# Altium PCB LORA_NODE.PcbDoc
Units mil, origin at the board's own origin, x right, y up, seen from the top; angles counter-clockwise.
Board outline 3149.61 x 2755.91 mil, 2 copper layers (Top Layer, Bottom Layer); 109 components, 85 nets, 348 pads, 46 vias.
Unrouted connection lines stored in the file: 13.
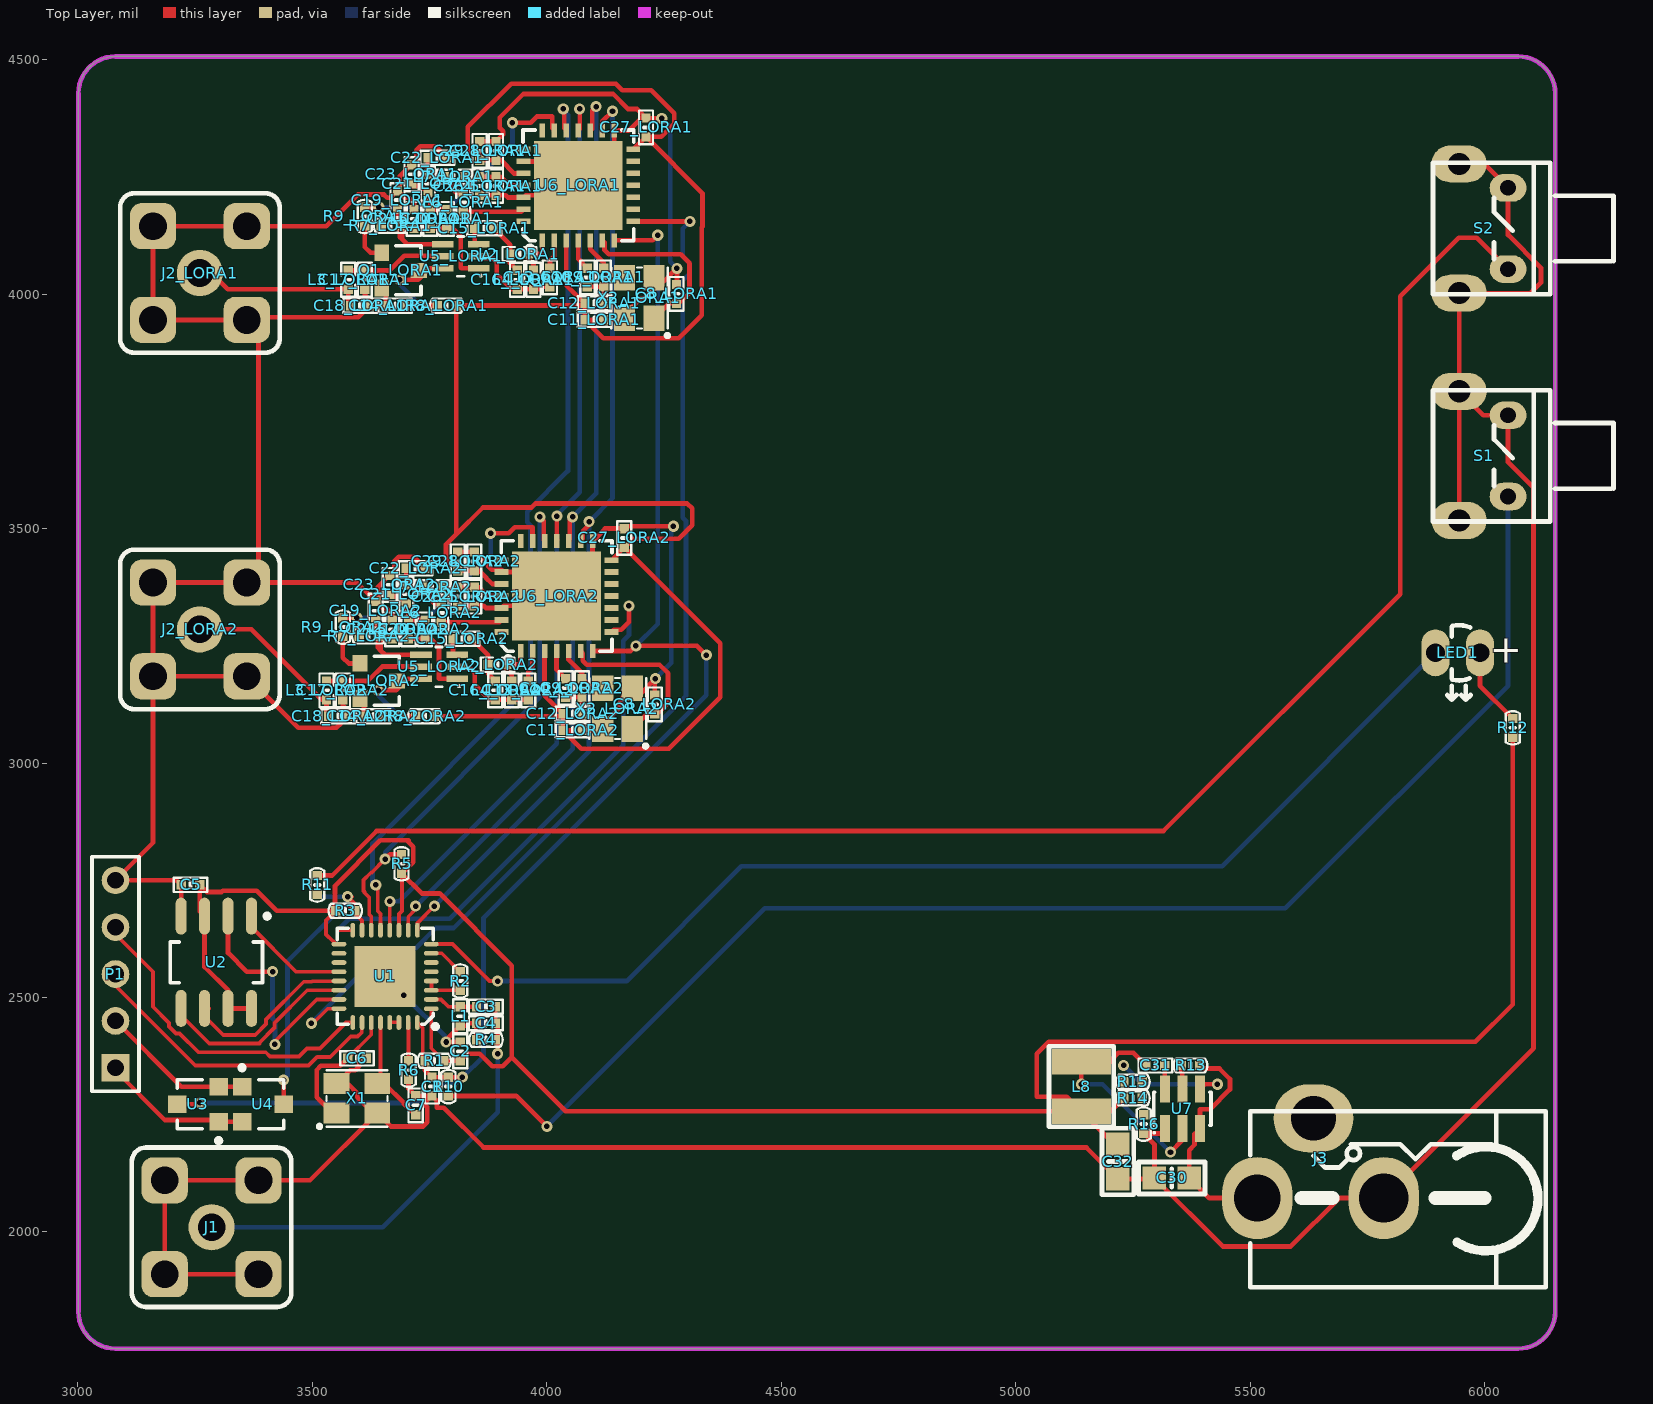
[diagram p0: Top Layer view]
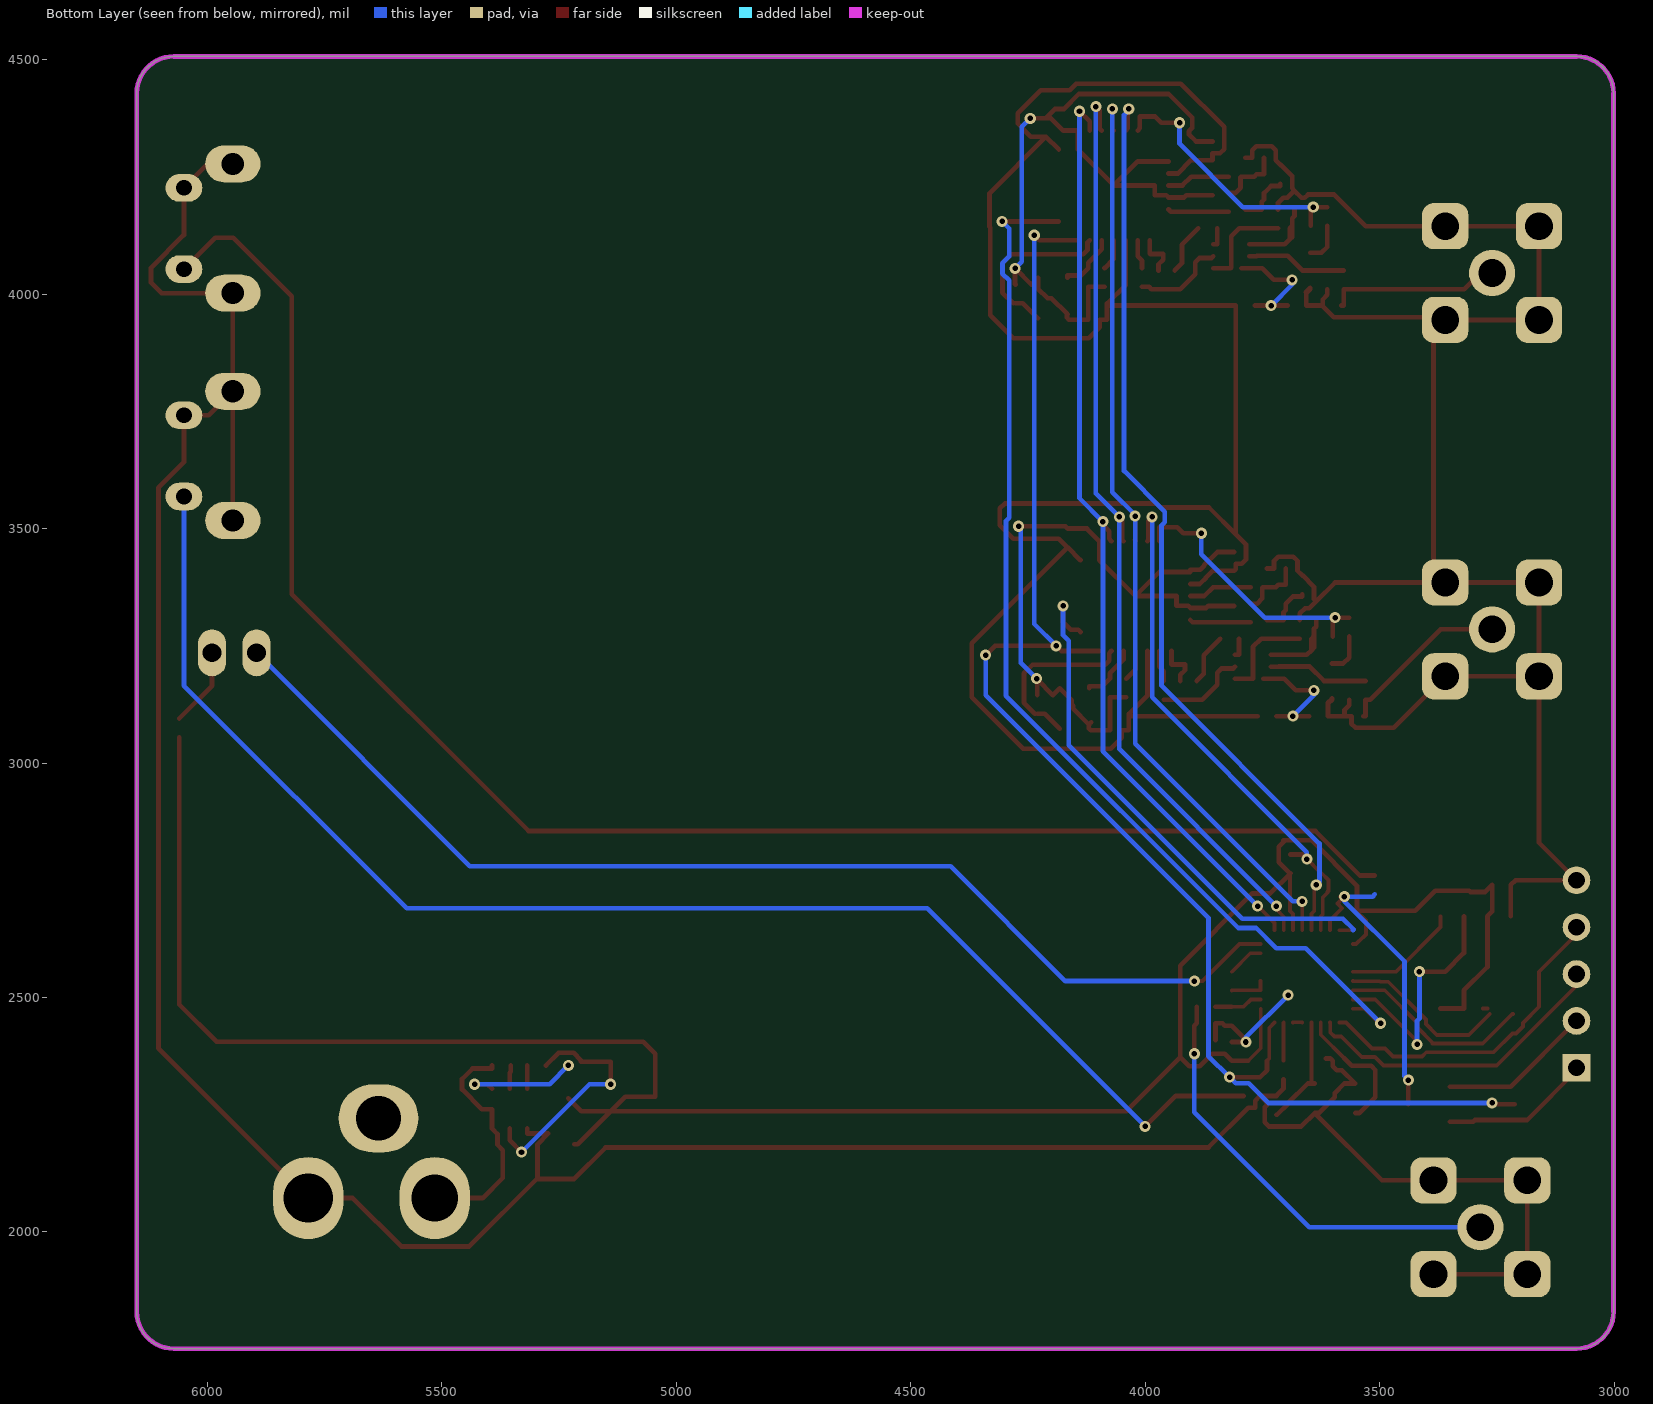
[diagram p1: Bottom Layer view, seen from below]
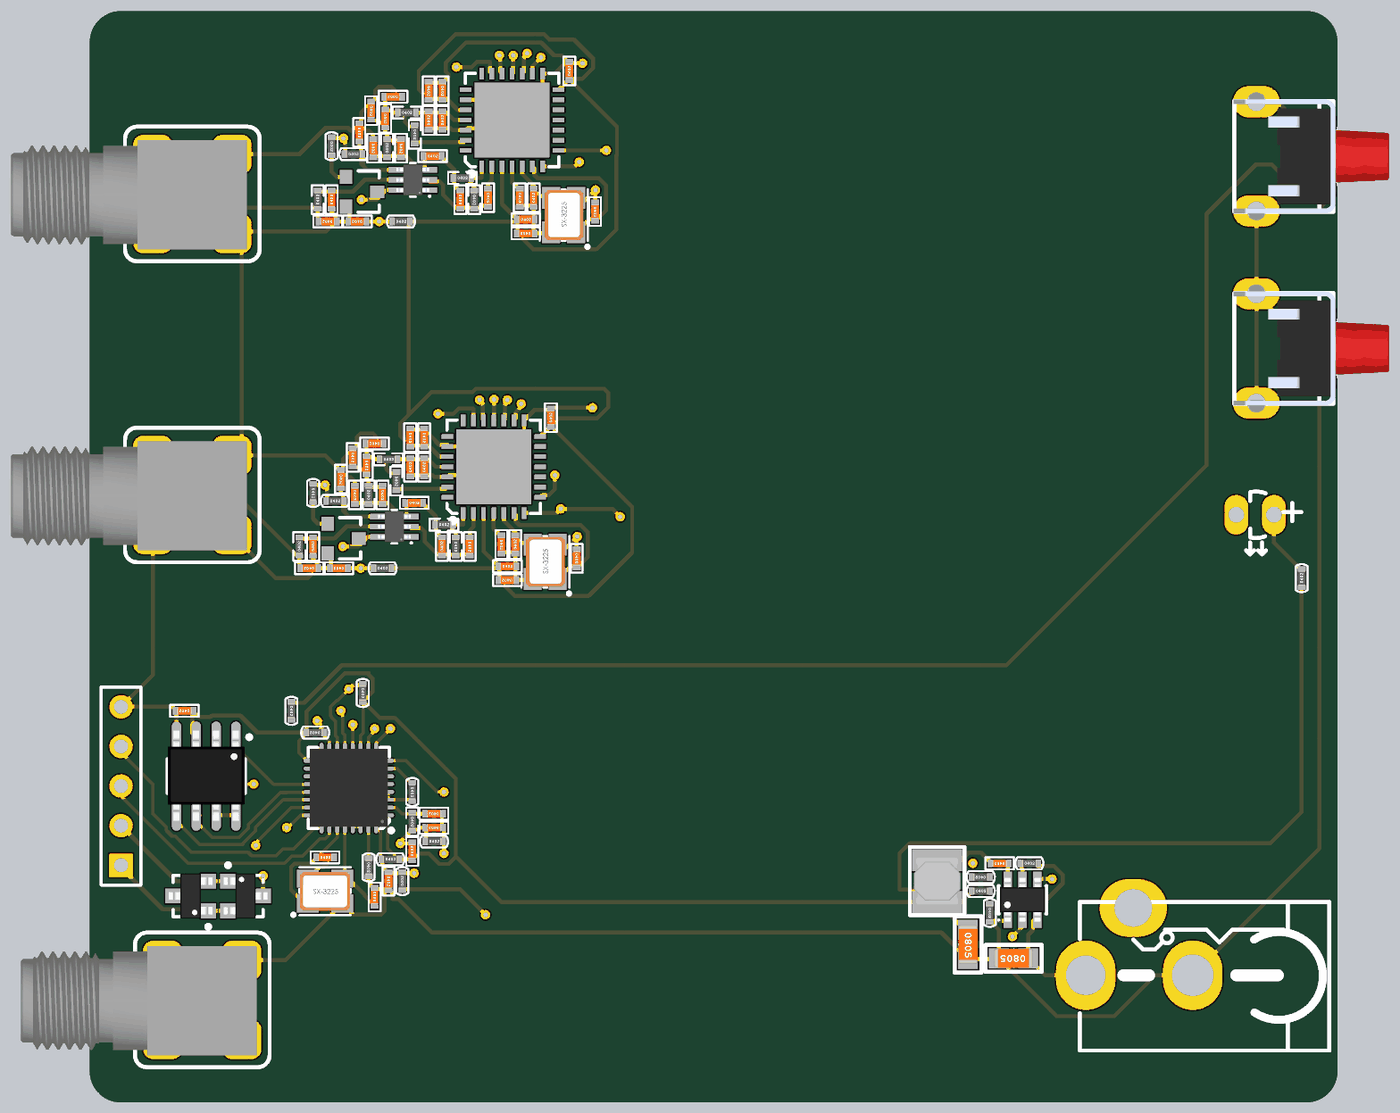
[diagram p2: 3D render of the assembled board from above, using the file's embedded part models]

## Layer stack, top to bottom
Top Solder: solder mask 0.4, Solder Resist, Dk 3.5
Top Layer: signal copper 1.4
Dielectric 1: dielectric 12.6, FR-4, Dk 4.8
Bottom Layer: signal copper 1.4
Bottom Solder: solder mask 0.4, Solder Resist, Dk 3.5

## Board outline
3000.91,1829.84 3000.91,4428.27 cw(c3079.65,4428.27) 3079.65,4507.01 6071.77,4507.01 cw(c6071.77,4428.27) 6150.51,4428.27 6150.51,1829.84 cw(c6071.77,1829.84) 6071.77,1751.1 3079.65,1751.1 cw(c3079.65,1829.84)

## Design rules (kind name [scope] priority, off if disabled: settings)
Clearance [All] p1: gap=10 ignorepadtopadclearanceinfootprint=TRUE
PolygonConnect [All] p1: connectstyle=Relief reliefconductorwidth=10 reliefentries=4 polygonreliefangle="90 Angle" airgapwidth=10
RoomDefinition LORA2 [InComponentClass('LORA2')] p1: confinementstyle=ConfineIn formatcopy=TRUE lockcomponents=FALSE outline 2765,3594.41 4423.5,3594.41 4423.5,2889.41 2765,2889.41
RoomDefinition LORA1 [InComponentClass('LORA1')] p2: confinementstyle=ConfineIn formatcopy=TRUE lockcomponents=FALSE outline 2765,4470 4470,4470 4470,3765 2765,3765
RoutingVias [All] p1: holewidth=11.81 width=23.62 viastyle="Through Hole" minholewidth=3.94 minwidth=11.81 maxholewidth=15.75 maxwidth=31.5
SMDToPlane [All] p1: distance=0
SolderMaskExpansion [All] p1: expansion=4
Width [All] p1: maxlimit=10 minlimit=2 preferedwidth=10
30 further rules are at their usual default settings.

## Classes and differential pairs
component class "Components Class 1": C1 C2 C3 C4 C5 C6 C7 C30 C31 C32 L1 L8 P1 R1 R2 R3 R4 R5 R6 R10 R13 R14 R15 R16 U1 U2 U3 U7 X1
channel class 03_LORA: LORA1 LORA2
component class U_05_POWER: C30 C31 C32 J3 L8 R13 R14 R15 R16 U7
component class U_04_KEY: LED1 R10 R11 R12 S1 S2
component class U_02_ESP8266: C1 C2 C3 C4 C5 C6 C7 J1 L1 P1 R1 R2 R3 R4 R5 R6 U1 U2 U3 X1
component class LORA1: C8_LORA1 C9_LORA1 C10_LORA1 C11_LORA1 C12_LORA1 C13_LORA1 C14_LORA1 C15_LORA1 C16_LORA1 C17_LORA1 C18_LORA1 C19_LORA1 C20_LORA1 C21_LORA1 C22_LORA1 C23_LORA1 C24_LORA1 C25_LORA1 C26_LORA1 C27_LORA1 C28_LORA1 C29_LORA1 J2_LORA1 L2_LORA1 L3_LORA1 L4_LORA1 L5_LORA1 L6_LORA1 L7_LORA1 Q1_LORA1 R7_LORA1 R8_LORA1 R9_LORA1 U5_LORA1 U6_LORA1 X2_LORA1

## Components (designator, comment, footprint, x,y, rotation, side; value= is the part's Value field where it differs from the comment)
C1 "1uF" SMT_C_0402 3755,2310 r270 top
C2 "0.1uF" SMT_C_0402 3815,2385 r90 top
C3 "8.6pF" SMT_C_0402 3870,2480 r180 top
C4 "2.4pF" SMT_C_0402 3870,2445 r180 top
C5 "100nF" SMT_C_0402 3240,2740 r180 top
C6 "3.9pF" SMT_C_0402 3595,2370 r0 top
C7 "3.9pF" SMT_C_0402 3720,2270 r90 top
C8_LORA1 "15pF" SMT_C_0402 4276.5,4000.59 r270 top (schematic designator C8)
C8_LORA2 "15pF" SMT_C_0402 4230,3125 r270 top (schematic designator C8)
C9_LORA1 "15pF" SMT_C_0402 4121.5,4035.59 r90 top (schematic designator C9)
C9_LORA2 "15pF" SMT_C_0402 4075,3160 r90 top (schematic designator C9)
C10_LORA1 "100nF" SMT_C_0402 4086.5,4035.59 r270 top (schematic designator C10)
C10_LORA2 "100nF" SMT_C_0402 4040,3160 r270 top (schematic designator C10)
C11_LORA1 "47pF" SMT_C_0402 4101.5,3945.59 r180 top (schematic designator C11)
C11_LORA2 "47pF" SMT_C_0402 4055,3070 r180 top (schematic designator C11)
C12_LORA1 "100nF" SMT_C_0402 4101.5,3980.59 r0 top (schematic designator C12)
C12_LORA2 "100nF" SMT_C_0402 4055,3105 r0 top (schematic designator C12)
C13_LORA1 "100nF" SMT_C_0402 4006.5,4035.59 r270 top (schematic designator C13)
C13_LORA2 "100nF" SMT_C_0402 3960,3155 r270 top (schematic designator C13)
C14_LORA1 "100pF" SMT_C_0402 3676.5,3975.59 r180 top (schematic designator C14)
C14_LORA2 "100pF" SMT_C_0402 3630,3100 r180 top (schematic designator C14)
C15_LORA1 "47pF" SMT_C_0402 3866.5,4140.59 r0 top (schematic designator C15)
C15_LORA2 "47pF" SMT_C_0402 3820,3265 r0 top (schematic designator C15)
C16_LORA1 "NC" SMT_C_0402 3936.5,4030.59 r90 top (schematic designator C16)
C16_LORA2 "NC" SMT_C_0402 3890,3155 r90 top (schematic designator C16)
C17_LORA1 "NC" SMT_C_0402 3611.5,4030.59 r90 top (schematic designator C17)
C17_LORA2 "NC" SMT_C_0402 3565,3155 r90 top (schematic designator C17)
C18_LORA1 "NC" SMT_C_0402 3601.5,3975.59 r180 top (schematic designator C18)
C18_LORA2 "NC" SMT_C_0402 3555,3100 r180 top (schematic designator C18)
C19_LORA1 "100pF" SMT_C_0402 3681.5,4200.59 r270 top (schematic designator C19)
C19_LORA2 "100pF" SMT_C_0402 3635,3325 r270 top (schematic designator C19)
C20_LORA1 "2.7pF" SMT_C_0402 3786.5,4160.59 r270 top (schematic designator C20)
C20_LORA2 "2.7pF" SMT_C_0402 3740,3285 r270 top (schematic designator C20)
C21_LORA1 "47pF" SMT_C_0402 3746.5,4235.59 r270 top (schematic designator C21)
C21_LORA2 "47pF" SMT_C_0402 3700,3360 r270 top (schematic designator C21)
C22_LORA1 "4.7pF" SMT_C_0402 3766.5,4290.59 r180 top (schematic designator C22)
C22_LORA2 "4.7pF" SMT_C_0402 3720,3415 r180 top (schematic designator C22)
C23_LORA1 "6.8pF" SMT_C_0402 3711.5,4255.59 r270 top (schematic designator C23)
C23_LORA2 "6.8pF" SMT_C_0402 3665,3380 r270 top (schematic designator C23)
C24_LORA1 "6.8pF" SMT_C_0402 3716.5,4160.59 r270 top (schematic designator C24)
C24_LORA2 "6.8pF" SMT_C_0402 3670,3285 r270 top (schematic designator C24)
C25_LORA1 "47pF" SMT_C_0402 3891.5,4230.59 r90 top (schematic designator C25)
C25_LORA2 "47pF" SMT_C_0402 3845,3355 r90 top (schematic designator C25)
C26_LORA1 "10nF" SMT_C_0402 3856.5,4230.59 r90 top (schematic designator C26)
C26_LORA2 "10nF" SMT_C_0402 3810,3355 r90 top (schematic designator C26)
C27_LORA1 "100nF" SMT_C_0402 4211.5,4355.59 r90 top (schematic designator C27)
C27_LORA2 "100nF" SMT_C_0402 4165,3480 r90 top (schematic designator C27)
C28_LORA1 "47pF" SMT_C_0402 3891.5,4305.59 r270 top (schematic designator C28)
C28_LORA2 "47pF" SMT_C_0402 3845,3430 r270 top (schematic designator C28)
C29_LORA1 "100nF" SMT_C_0402 3856.5,4305.59 r270 top (schematic designator C29)
C29_LORA2 "100nF" SMT_C_0402 3810,3430 r270 top (schematic designator C29)
C30 "22uF 25V" SMT_C_0805 5332.76,2115 r180 top
C31 "1uF" SMT_C_0402 5297.76,2355 r180 top
C32 "22uF" SMT_C_0805 5217.76,2150 r270 top
J1 "SMA-60-12-5M8-049" SMA-60-12-5M8-049 3285,2010 r90 top
J2_LORA1 "SMA-60-12-5M8-049" SMA-60-12-5M8-049 3260,4045 r90 top (schematic designator J2)
J2_LORA2 "SMA-60-12-5M8-049" SMA-60-12-5M8-049 3260,3285 r90 top (schematic designator J2)
J3 "DC-JACK" DC-JACK-6.2mm-ROUND 5785,2072.24 r180 top
L1 "1nH" SMT_L_0402 3815,2460 r270 top
L2_LORA1 "4.7pF" SMT_L_0402 3941.5,4085.59 r0 top (schematic designator L2)
L2_LORA2 "4.7pF" SMT_L_0402 3895,3210 r0 top (schematic designator L2)
L3_LORA1 "47pF" SMT_L_0402 3576.5,4030.59 r90 top (schematic designator L3)
L3_LORA2 "47pF" SMT_L_0402 3530,3155 r90 top (schematic designator L3)
L4_LORA1 "18nH" SMT_L_0402 3971.5,4030.59 r270 top (schematic designator L4)
L4_LORA2 "18nH" SMT_L_0402 3925,3155 r270 top (schematic designator L4)
L5_LORA1 "12nH" SMT_L_0402 3751.5,4160.59 r90 top (schematic designator L5)
L5_LORA2 "12nH" SMT_L_0402 3705,3285 r90 top (schematic designator L5)
L6_LORA1 "2.2nH" SMT_L_0402 3821.5,4195.59 r270 top (schematic designator L6)
L6_LORA2 "2.2nH" SMT_L_0402 3775,3320 r270 top (schematic designator L6)
L7_LORA1 "82nH" SMT_L_0402 3801.5,4250.59 r0 top (schematic designator L7)
L7_LORA2 "82nH" SMT_L_0402 3755,3375 r0 top (schematic designator L7)
L8 "4.7uH" SMT_L_3.3mm 5140,2310 r90 top
LED1 "直插LED-3mm" 直插LED-3mm 5990,3235 r180 top
P1 "Header 5" HDR1X5 3080,2350 r90 top
Q1_LORA1 "2SC3356" SOT-23S 3687.13,4050.59 r270 top (schematic designator Q1)
Q1_LORA2 "2SC3356" SOT-23S 3640.63,3175 r270 top (schematic designator Q1)
R1 "12K" SMT_R_0402 3760,2365 r0 top
R2 "12K" SMT_R_0402 3815,2535 r270 top
R3 "12K" SMT_R_0402 3570,2685 r180 top
R4 "12K" SMT_R_0402 3870,2410 r0 top
R5 "1K" SMT_R_0402 3690,2785 r270 top
R6 "12K" SMT_R_0402 3705,2345 r270 top
R7_LORA1 "10K" SMT_R_0402 3666.5,4145.59 r0 top (schematic designator R7)
R7_LORA2 "10K" SMT_R_0402 3620,3270 r0 top (schematic designator R7)
R8_LORA1 "1M" SMT_R_0402 3786.5,3975.59 r0 top (schematic designator R8)
R8_LORA2 "1M" SMT_R_0402 3740,3100 r0 top (schematic designator R8)
R9_LORA1 "1K" SMT_R_0402 3611.5,4165.59 r270 top (schematic designator R9)
R9_LORA2 "1K" SMT_R_0402 3565,3290 r270 top (schematic designator R9)
R10 "470" SMT_R_0402 3790,2310 r90 top
R11 "470" SMT_R_0402 3510,2740 r270 top
R12 "470" SMT_R_0402 6060,3075 r90 top
R13 "100k" SMT_R_0402 5372.76,2355 r0 top
R14 "47k 1%" SMT_R_0402 5250,2285 r0 top
R15 "75k 1%" SMT_R_0402 5250,2320 r180 top
R16 "15k 1%" SMT_R_0402 5272.76,2230 r270 top
S1 "按键开关-6x6-卧式-直插" 按键开关-6x6-卧式-直插 6050,3655 r0 top
S2 "按键开关-6x6-卧式-直插" 按键开关-6x6-卧式-直插 6050,4140 r0 top
U1 "ESP8266" QFN32 3655,2545 r180 top
U2 "W25Qxx" SOP-8 3295,2575 r270 top
U3 "DTC143" SOT23-3 3255.71,2272.4 r90 top
U4 "DTC143" SOT23-3 3394.29,2272.4 r270 top
U5_LORA1 "UPG2179" SC70-6 3816.5,4080.59 r180 top (schematic designator U5)
U5_LORA2 "UPG2179" SC70-6 3770,3205 r180 top (schematic designator U5)
U6_LORA1 "SX1278" QFN28-6x6 4067.09,4231.77 r90 top (schematic designator U6)
U6_LORA2 "SX1278" QFN28-6x6 4020.59,3356.18 r90 top (schematic designator U6)
U7 "MP1470" SOT23-6 5355.35,2262.68 r0 top
X1 "26MHz" SMT_XTAL_3225 3595,2285 r0 top
X2_LORA1 "32MHz" SMT_XTAL_3225 4197.09,3991.77 r90 top (schematic designator X2)
X2_LORA2 "32MHz" SMT_XTAL_3225 4150.59,3116.18 r90 top (schematic designator X2)

## Footprints (in the part's own frame and the unit in brackets; to place one, negate y for a bottom-side part, rotate by r counter-clockwise, add the part's x,y. Pads: shape width x height; smd on the part's side, far side on the other; paste and mask are expansions set on the pad)
DC-JACK-6.2mm-ROUND [mil] "电源插孔"
  oval 150x175 hole 100: 1(270,0)
  oval 150x175 hole 105: 2(0,0)
  oval 170x145 hole 95: 3(150,-170)
  silkscreen extent -345,-185 285,190, body extent -350,-185 285,190, height 433
HDR1X5 [mm] "Connector; Header; 5 Position"
  rect 1.5x1.5 hole 0.9: 1(0,0)
  round 1.5 hole 0.9: 2(2.54,0) 3(5.08,0) 4(7.62,0) 5(10.16,0)
  silkscreen extent -1.27,-1.27 11.43,1.27
QFN28-6x6 [mm]
  rect 4.8x4.8 smd: 0(0,0)
  rect 0.75x0.3 smd: 1(-2.975,1.95) 2(-2.975,1.3) 3(-2.975,0.65) 4(-2.975,0) 5(-2.975,-0.65) 6(-2.975,-1.3) 7(-2.975,-1.95) 15(2.975,-1.95) 16(2.975,-1.3) 17(2.975,-0.65) 18(2.975,0) 19(2.975,0.65) 20(2.975,1.3) 21(2.975,1.95)
  rect 0.3x0.75 smd: 8(-1.95,-2.975) 9(-1.3,-2.975) 10(-0.65,-2.975) 11(0,-2.975) 12(0.65,-2.975) 13(1.3,-2.975) 14(1.95,-2.975) 22(1.95,2.975) 23(1.3,2.975) 24(0.65,2.975) 25(0,2.975) 26(-0.65,2.975) 27(-1.3,2.975) 28(-1.95,2.975)
  silkscreen extent -3.61,-3 3,3, body extent -3,-3 3,3, height 1.01
QFN32 [mm] "32-Pin Quad Flat No-Lead 0.5 mm Pitch, IPC High Density"
  oval 0.8x0.25 smd: 1(-2.5,1.75) 2(-2.5,1.25) 3(-2.5,0.75) 4(-2.5,0.25) 5(-2.5,-0.25) 6(-2.5,-0.75) 7(-2.5,-1.25) 8(-2.5,-1.75) 17(2.5,-1.75) 18(2.5,-1.25) 19(2.5,-0.75) 20(2.5,-0.25) 21(2.5,0.25) 22(2.5,0.75) 23(2.5,1.25) 24(2.5,1.75)
  oval 0.25x0.8 smd: 9(-1.75,-2.5) 10(-1.25,-2.5) 11(-0.75,-2.5) 12(-0.25,-2.5) 13(0.25,-2.5) 14(0.75,-2.5) 15(1.25,-2.5) 16(1.75,-2.5) 25(1.75,2.5) 26(1.25,2.5) 27(0.75,2.5) 28(0.25,2.5) 29(-0.25,2.5) 30(-0.75,2.5) 31(-1.25,2.5) 32(-1.75,2.5)
  rect 3.3x3.3 smd paste-2.54: 33(0,0)
  silkscreen extent -2.84,-2.6 2.6,2.84, body extent -2.51,-2.51 2.51,2.51, height 0.8
SC70-6 [mil] "SC70/SOT-323 (DCK) Package. 6-Lead Plastic SC70."
  rect 46x14 smd: 1(-38.5,25.59) 2(-38.5,0) 3(-38.5,-25.59) 4(38.5,-25.59) 5(38.5,0) 6(38.5,25.59)
  silkscreen extent -44,-42 7,42, body extent -41,-39 41,39, height 36
SMA-60-12-5M8-049 [mm] "SMA-60-12-5M8-049"
  round 2.5 hole 1.5: 1(0,0)
  rrect50% 2.5x2.5 hole 1.5: 2(-2.54,2.54) 3(2.54,2.54) 4(2.54,-2.54) 5(-2.54,-2.54)
  silkscreen extent -4.32,-4.32 4.32,4.32, body extent -3.56,-3.49 3.44,11.61, height 10.86
SMT_C_0402 [mil] "Surface mount capacitor 0402"
  rect 20x20 smd: 1(-20,0) 2(20,0)
  silkscreen extent -36,-15 36,15, body extent -20,-10 20,10, height 20
SMT_C_0805 [mil] "Surface mount capacitor 0805"
  rect 50x50 smd: 1(-37,0) 2(37,0)
  silkscreen extent -71,-34 71,34, body extent -49,-24 49,25, height 31
SMT_L_3.3mm [mm] "LPO3310 SMT Power Inductor, 3.3x3.3x1mm"
  rect 1.4x3.2 smd: 1(-1.34,0) 2(1.34,0)
  silkscreen extent -2.18,-1.75 2.18,1.75, body extent -1.5,-1.5 1.5,1.5, height 1
SMT_L_0402 [mil] "Surface mount inductor 0402"
  rect 20x20 smd: 1(-20,0) 2(20,0)
  silkscreen extent -36,-15 36,15, body extent -20,-10 20,10, height 20
SMT_R_0402 [mil] "Surface mount resistor 0402"
  rect 20x20 smd: 1(-20,0) 2(20,0)
  silkscreen extent -36,-15 36,15, body extent -20,-10 20,10, height 20
SMT_XTAL_3225 [mm] "Quartz Crystal, SM; Body 3.2 x 2.5 mm"
  rect 1.4x1.15 smd: 1(-1.1,-0.8) 2(1.1,-0.8) 3(1.1,0.8) 4(-1.1,0.8)
  silkscreen extent -2.13,-1.62 1.65,1.52, body extent -1.6,-1.27 1.6,1.23, height 0.81
SOP-8 [mm] "8-Pin Small Outline Integrated Circuit 1.27 mm Pitch, IPC Low Density"
  oval 2x0.6 smd: 1(-2.5,1.905) 2(-2.5,0.635) 3(-2.5,-0.635) 4(-2.5,-1.905) 5(2.5,-1.905) 6(2.5,-0.635) 7(2.5,0.635) 8(2.5,1.905)
  silkscreen extent -2.62,-2.5 1.1,2.88, body extent -2.92,-2.45 2.86,2.45, height 1.45
SOT23-3 [mm] "SOT-23; 3 Leads; Body 3.0 x 2.5 mm, inc. leads (LxW max)"
  rect 0.95x1 smd: 1(-0.95,-1.125) 2(0.95,-1.125) 3(0,1.125)
  silkscreen extent -2.1,-1.25 1.33,1.13, body extent -1.45,-1.4 1.45,1.4, height 1.3
SOT23-6 [mm] "SOT-457/SC-74; 6 Leads; Body 3 x 3 mm, inc. leads (LxW max)"
  rect 0.55x1.45 smd: 1(-0.95,-1.075) 2(0,-1.075) 3(0.95,-1.075) 4(0.95,1.075) 5(0,1.075) 6(-0.95,1.075)
  silkscreen extent -1.57,-1.35 1.55,0.9, body extent -1.45,-1.4 1.45,1.4, height 1.45
SOT-23S [mm]
  rect 0.9x0.8 smd: 1(-0.95,-1) 2(0.95,-1)
  rect 0.8x0.9 smd: 3(0,1)
  silkscreen extent -1.34,-0.22 1.31,1.12, body extent -1.16,-1.31 1.15,1.3, height 0.38
按键开关-6x6-卧式-直插 [mm] "按键开关-6x6-卧式-直插"
  oval 2x1.5 hole 0.85: 1(0,-2.2) 2(0,2.2)
  oval 3x2 hole 1.2: 3(-2.65,3.5) 4(-2.65,-3.5)
  silkscreen extent -4.06,-3.56 5.71,3.56, body extent -4.13,-4.18 5.84,4.18, height 7.37
直插LED-3mm [mil] "直插LED"
  oval 60x100 hole 40: 1(0,0) 2(95,0)
  silkscreen extent 20,-59 70,100

## Part data
C1 C2 C3 C4 C6 C7 C8_LORA1 C8_LORA2 C9_LORA1 C9_LORA2 C10_LORA1 C10_LORA2 C11_LORA1 C11_LORA2 C12_LORA1 C12_LORA2 C13_LORA1 C13_LORA2 C14_LORA1 C14_LORA2 C15_LORA1 C15_LORA2 C16_LORA1 C16_LORA2 C17_LORA1 C17_LORA2 C18_LORA1 C18_LORA2 C19_LORA1 C19_LORA2 C20_LORA1 C20_LORA2 C21_LORA1 C21_LORA2 C22_LORA1 C22_LORA2 C23_LORA1 C23_LORA2 C24_LORA1 C24_LORA2 C25_LORA1 C25_LORA2 C26_LORA1 C26_LORA2 C27_LORA1 C27_LORA2 C28_LORA1 C28_LORA2 C29_LORA1 C29_LORA2: library part SMT_C_0402_1, "Surface mount capacitor 0402"
C5 C31: library part SMT_C_0402, "Surface mount capacitor 0402"
C30 C32: library part SMT_C_0805, "Surface mount capacitor 0805"
J1 J2_LORA1 J2_LORA2: "sma 60-12-5M8-049"
J3: "电源插孔"
L1 L2_LORA1 L2_LORA2 L3_LORA1 L3_LORA2 L4_LORA1 L4_LORA2 L5_LORA1 L5_LORA2 L6_LORA1 L6_LORA2 L7_LORA1 L7_LORA2: library part SMT_L_0402, "Surface mount inductor 0402"
L8: library part SMT_L_3.3mm, "LPO3310 SMT Power Inductor, 3.3x3.3x1mm"
P1: "Header, 5-Pin", LatestRevisionDate=17-Jul-2002, LatestRevisionNote="Re-released for DXP Platform.", Publisher="Altium Limited"
Q1_LORA1 Q1_LORA2: library part NPN, "NPN Bipolar Transistor", Code_JEDEC=TO-226-AA, LatestRevisionDate=17-Jul-2002, LatestRevisionNote="Re-released for DXP Platform.", PackageDescription="TO, Flat Index; 3 In-Line, Axial Leads; Body Dia. 4.8mm; Leads 0.55 x 0.51 mm (max)", PackageReference=TO-226-AA, Published=8-Jun-2000, Publisher="Altium Limited"
R1 R2 R3 R4 R5 R6 R7_LORA1 R7_LORA2 R8_LORA1 R8_LORA2 R9_LORA1 R9_LORA2 R10 R11 R12 R13 R14 R15 R16: library part SMT_R_0402, "Surface mount resistor 0402"
U2: "Serial flash memory with dual and quad SPI"
U3 U4: "Digital transistors (built-in resistors)"
U7: "High-Efficiency, 2A, 16V, 500kHz  Synchronous, Step-Down Converter"
X1 X2_LORA1 X2_LORA2: library part SMT_XTAL_PASSIVE, "Passive crystal"

## Via types
v1: diameter 23.62, hole 11.81, Top Layer to Bottom Layer, 46 vias

## Nets (pads, with @x,y where several pads share a name; then routed paths per layer and width w, separated by ;. In a path a pad name is that pad's centre, name@x,y a point inside that pad or via, vN(x,y) a via of type N, cw(c..) or ccw(c..) an arc to the next point about the centre after c; other vN are vias at no path point)
ADC: U1.6
ANT: C3.1 C4.1 J1.1 R4.2 | length 938.6
  Top Layer w10: C3.1 C4.1 3895,2440 v1(3895,2380)
  Bottom Layer w10: J1.1 3650,2010 3895,2255 v1(3895,2380)
ANT_LORA1: C18_LORA1.2 J2_LORA1.1 L3_LORA1.1 | length 370.8
  Top Layer w10: J2_LORA1.1 3285,4045 3319.41,4010.59 L3_LORA1.1 3576.5,3975.59 C18_LORA1.2
ANT_LORA2: C18_LORA2.2 J2_LORA2.1 L3_LORA2.1 | length 372.1
  Top Layer w10: J2_LORA2.1 3370,3285 3520,3135 L3_LORA2.1 3530,3100 C18_LORA2.2
CLK: U1.21 U2.6 | length 373.2
  Top Layer w8: U2.6@3265,2465 3310,2420 3378.04,2420 3401.19,2443.15 3401.19,2453.15 3481.51,2533.47 3498.47,2533.47 3499.39,2534.39 3555.81,2534.39 U1.21 ; U2.6 U2.6@3279.39,2476.57
CS: U1.20 U2.1 | length 249.4
  Top Layer w8: U2.1 3370,2650 3465.16,2554.84 U1.20
D0: U1.22 U2.5 | length 422.5
  Top Layer w8: U2.5@3215,2465 3216.96,2465 3279.96,2402 3387.46,2402 3386.48,2402.98 3419.19,2435.69 3419.19,2445.69 3488.97,2515.47 U1.22
D1: U1.23 U2.2 | length 527.1
  Top Layer w8: v1(3420,2400) 3420,2406.5 3509.29,2495.79 U1.23
  Top Layer w10: U2.2 3320,2595 3360,2555 v1(3415,2555)
  Bottom Layer w10: v1(3415,2555) 3415,2455 3420,2450 v1(3420,2400)
DIO0_LORA1: U1.24 U6_LORA1.8 | length 2315.8
  Top Layer w8: v1@3495,2445 v1(3497.92,2445) 3501.5,2445 3532.6,2476.1 U1.24
  Top Layer w10: U6_LORA1.8 4187.49,4155 v1(4305,4155)
  Bottom Layer w10: v1(3497.92,2445) 3657.92,2605 3720,2605 3763.19,2648.19 3801.47,2648.19 4296.81,3143.53 4296.81,3516.11 4290,3522.92 4290,4029.6 4304.29,4043.89 4304.29,4066.11 4290,4080.4 4290,4140 v1(4305,4155)
DIO0_LORA2: U1.16 U6_LORA2.8 | length 1187.3
  Top Layer w8: 3555,2645 3556.57,2643.43 U1.16
  Top Layer w10: U6_LORA2.8 4142.4,3284.09 4158.69,3284.09 4175,3300.4 v1(4175,3335)
  Bottom Layer w10: 3556.57,2643.43 3555,2645 3578.19,2668.19 3793.19,2668.19 4163.19,3038.19 4163.19,3261.11 4175,3272.92 v1(4175,3335)
DIO1_LORA1: U6_LORA1.9
DIO1_LORA2: U6_LORA2.9
DIO2_LORA1: U6_LORA1.10
DIO2_LORA2: U6_LORA2.10
DIO3_LORA1: U6_LORA1.11
DIO3_LORA2: U6_LORA2.11
DIO4_LORA1: U6_LORA1.12
DIO4_LORA2: U6_LORA2.12
DIO5_LORA1: U6_LORA1.13
DIO5_LORA2: U6_LORA2.13
DTR: P1.1 U3.1 U4.2 | length 336
  Top Layer w10: P1.1@3065,2350 P1.1 3080,2344.22 3185.52,2238.7 3296.3,2238.7 U3.1 U4.2
EN: R2.1 U1.7 | length 77.8
  Top Layer w8: U1.7 3775.79,2594.21 R2.1
GND: C1.2 C2.2 C4.2 C5.2 C6.2 C7.2 C8_LORA1.1 C8_LORA2.1 C9_LORA1.1 C9_LORA2.1 C10_LORA1.2 C10_LORA2.2 C11_LORA1.1 C11_LORA2.1 C12_LORA1.2 C12_LORA2.2 C13_LORA1.2 C13_LORA2.2 C14_LORA1.2 C14_LORA2.2 C16_LORA1.1 C16_LORA2.1 C17_LORA1.1 C17_LORA2.1 C18_LORA1.1 C18_LORA2.1 C19_LORA1.1 C19_LORA2.1 C22_LORA1.1 C22_LORA2.1 C23_LORA1.1 C23_LORA2.1 C24_LORA1.1 C24_LORA2.1 C25_LORA1.1 C25_LORA2.1 C26_LORA1.1 C26_LORA2.1 C27_LORA1.2 C27_LORA2.2 C28_LORA1.1 C28_LORA2.1 C29_LORA1.1 C29_LORA2.1 C30.2 C32.2 J1.2 J1.3 J1.4 J1.5 J2_LORA1.2 J2_LORA1.3 J2_LORA1.4 J2_LORA1.5 J2_LORA2.2 J2_LORA2.3 J2_LORA2.4 J2_LORA2.5 J3.2 L1.2 L4_LORA1.2 L4_LORA2.2 P1.5 Q1_LORA1.2 Q1_LORA2.2 R4.1 R6.2 R16.2 S1.2 S1.3 S1.4 S2.2 S2.3 S2.4 U1.33 U2.4 U5_LORA1.2 U5_LORA2.2 U6_LORA1.0 U6_LORA1.15 U6_LORA1.23 U6_LORA1.26 U6_LORA2.0 U6_LORA2.15 U6_LORA2.23 U6_LORA2.26 U7.1 X1.2 X1.4 X2_LORA1.2 X2_LORA1.4 X2_LORA2.2 X2_LORA2.4 | length 15202.6
  Top Layer w10: J2_LORA1.2 J2_LORA1.3 ; J2_LORA1.2@3185,3945 J2_LORA1.5 J2_LORA1.5@3385,3945 ; J2_LORA1.3@3185,4145 J2_LORA1.4 3529.7,4145 3597.1,4212.4 3652.61,4212.4 3659.42,4205.59 3666.5,4205.59 C19_LORA1.1 ; U2.4 C5.2 3210,2750 P1.5 3160,2830 J2_LORA2.2 ; J1.5 J1.2 J1.3 J1.4 3494.8,2110 X1.2 ; C17_LORA2.1 3565,3123 3575,3113 C18_LORA2.1 ; Q1_LORA2.2 3610.67,3128.19 3601.26,3135 3610,3126.26 C14_LORA2.2 C18_LORA2.1 ; C17_LORA1.1 3611.5,3998.59 3621.5,3988.59 C18_LORA1.1 ; C6.2 3605.2,2370 3600,2364.8 3600,2353.79 3591.21,2345 3580.2,2345 X1.4 3575.31,2316.5 3595.75,2296.06 3595.75,2287.65 3629.89,2253.5 X1.2 ; Q1_LORA1.2 3657.17,4003.78 3647.76,4010.59 3656.5,4001.85 C14_LORA1.2 C18_LORA1.1 ; C24_LORA2.1 3670,3319 3659,3330 3650,3330 C19_LORA2.1 ; R6.2 3705,2305 C7.2 C1.2 ; C24_LORA1.1 3716.5,4194.59 3705.5,4205.59 3696.5,4205.59 C19_LORA1.1 ; C22_LORA2.1 3725,3415 3725,3431.21 3716.21,3440 3683.79,3440 3675,3431.21 3675,3410 C23_LORA2.1 3663.79,3400 3640,3376.21 3640,3350 C19_LORA2.1 ; C22_LORA1.1 3771.5,4290.59 3771.5,4306.8 3762.71,4315.59 3730.29,4315.59 3721.5,4306.8 3721.5,4285.59 C23_LORA1.1 3710.29,4275.59 3686.5,4251.8 3686.5,4225.59 C19_LORA1.1 ; U5_LORA2.2 3812.09,3201.41 3837.71,3201.41 3846.5,3192.62 3846.5,3167 3878.5,3135 C16_LORA2.1 L4_LORA2.2 C13_LORA2.2 ; C26_LORA2.1 C25_LORA2.1 3865.59,3335 3870,3330.59 U6_LORA2.26 3908.15,3335.27 3933.23,3335.27 3933.23,3356.18 U6_LORA2.0 ; C29_LORA2.1 C28_LORA2.1 3846.21,3450 3873.7,3422.51 3873.7,3420.83 3882.49,3412.05 3903.46,3412.05 U6_LORA2.23 3969.41,3407.36 U6_LORA2.0 ; C2.2 v1@3790,2405 ; R4.1@3850,2408.79 R4.1 C4.2 3835,2445 3830,2440 L1.2 v1@3785,2410 ; U5_LORA1.2 3858.59,4077 3884.21,4077 3893,4068.21 3893,4042.59 3925,4010.59 C16_LORA1.1 L4_LORA1.2 3986.5,4010.59 3991.5,4015.59 C13_LORA1.2 ; C26_LORA1.1 C25_LORA1.1 3912.09,4210.59 3916.5,4206.18 U6_LORA1.26 3954.65,4210.86 3979.73,4210.86 3979.73,4231.77 U6_LORA1.0 ; C29_LORA1.1 C28_LORA1.1 3906.5,4340.59 3906.5,4347.67 3899.69,4354.48 3899.69,4376.7 3949.8,4426.81 4141.11,4426.81 4172.92,4395 4192.09,4395 C27_LORA1.2 C27_LORA1.2@4212.09,4375 ; U6_LORA1.23 4015.91,4282.95 U6_LORA1.0 ; C10_LORA2.2 C9_LORA2.1 C12_LORA2.2 C11_LORA2.1 4116.22,3070 X2_LORA2.4 4120,3073.78 X2_LORA2.4@4120,3082.2 ; C10_LORA1.2 C9_LORA1.1 C12_LORA1.2 C11_LORA1.1 4162.72,3945.59 X2_LORA1.4 4166.5,3949.37 X2_LORA1.4@4166.5,3957.79 ; X2_LORA2.4@4115,3087.2 X2_LORA2.4@4120,3082.2 ; X2_LORA2.4@4119.09,3081.29 X2_LORA2.4@4120,3082.2 ; C8_LORA2.1 v1@4230,3178.43 ; v1(4231.57,3180) v1@4230,3178.43 ; v1(4245,4375) C27_LORA1.2@4212.09,4375 ; v1(4270,3505) 4170,3505 C27_LORA2.2 4124.06,3500 U6_LORA2.15 4097.36,3432.95 U6_LORA2.0 ; C8_LORA1.1 4277.48,4021.57 v1(4277.48,4055) 4243.07,4020.59 X2_LORA1.2 4228.59,4011.45 4208.15,3991.02 4199.73,3991.02 ; U7.1 5317.95,2210 R16.2 5295.76,2187 C30.2 ; S1.4 S1.3 ; S2.3 5998.82,4277.8 S2.2 6050,4126.2 6120,4056.2 6120,4024.49 6097.72,4002.2 S2.4 S1.3 ; J2_LORA2.2 J2_LORA2.3 J2_LORA2.4 ; J2_LORA2.2 J2_LORA2.5 3470,3075 3551.21,3075 3560,3083.79 3560,3100 C18_LORA2.1 ; J2_LORA2.4 3595,3385 C19_LORA2.1 ; J2_LORA2.4 3385,3410 3385,3939.41 3396.18,3950.59 3597.71,3950.59 3621.5,3974.38 C18_LORA1.1 ; X1.2 3666.81,2225 3736.21,2225 3745,2233.79 3745,2266.21 3740,2271.21 3740,2275 C1.2 ; C1.2 3765,2280 3765,2265 3780,2265 3865,2180 5150.76,2180 C32.2 5295.76,2113 C30.2 ; v1@3785,2410 v1@3790,2405 ; v1@3785,2410 v1(3785,2405) v1@3790,2405 ; U6_LORA1.0 4143.86,4308.54 U6_LORA1.15 4174.81,4348.9 4201.5,4375.59 4202.09,4375 C27_LORA1.2@4212.09,4375 ; X2_LORA2.4@4120,3082.2 4153.23,3115.43 4153.23,3122.22 4156.73,3125.72 4156.73,3134.13 X2_LORA2.2 ; X2_LORA1.4@4166.5,3957.79 4199.73,3991.02 ; X2_LORA1.4@4166.5,3957.79 4165.59,3956.88 4199.73,3991.02 ; X2_LORA2.2 X2_LORA2.2@4196.57,3145 ; X2_LORA2.2 X2_LORA2.2@4196.57,3145 ; X2_LORA2.2@4196.57,3145 v1@4230,3178.43 ; C30.2 5441.76,1969 5586.76,1969 5690,2072.24 J3.2 6104.37,2391.61 6104.37,3586.83 6050,3641.2 S1.2 5996.85,3741.61 S1.3
  Bottom Layer w10: v1(3695,2505) 3785,2415 v1@3785,2410 ; v1(4231.57,3180) 4265,3213.43 4265,3505 v1(4270,3505) ; v1(4245,4375) 4263.31,4356.69 4263.31,4069.17 v1(4277.48,4055)
GPIO0: R3.1 R11.2 U1.15 U4.3 | length 670.5
  Top Layer w8: v1(3575,2715) 3584.8,2715 3580,2710.2 3590,2700.2 3580,2690.2 3605.79,2664.41 U1.15
  Top Layer w10: U4.3 v1(3438.58,2323.58) v1@3440,2325
  Bottom Layer w10: v1(3438.58,2323.58) 3446.81,2331.81 3446.81,2576.81 3575,2705 v1(3575,2715) 3515,2715 3510,2720
GPIO16: LED1.2 U1.8 | length 2464.2
  Top Layer w8: U1.8 3798.9,2613.9 3877.8,2535 v1(3895,2535)
  Bottom Layer w10: v1(3895,2535) 4170,2535 4415,2780 5440,2780 LED1.2
IO2: R5.1 U1.14 U6_LORA2.19 | length 1139.8
  Top Layer w8: U1.14 3625.47,2672.57 3621.19,2676.85 3621.19,2713.13 3610.81,2723.51 3610.81,2725.69 3609.19,2727.31 3609.19,2750.69 3624.31,2765.81 3625.81,2765.81 v1(3655,2795)
  Top Layer w10: v1(3655,2795) 3665,2805 R5.1 ; v1(3985,3525) 3993.19,3516.81 3993.19,3475.12 U6_LORA2.19
  Bottom Layer w10: v1(3655,2795) 3655,2810 3985,3140 v1(3985,3525)
IO9: U1.18
IO10: U1.19
IO12: U1.10 U6_LORA1.17 U6_LORA2.17 | length 2034.1
  Top Layer w8: U1.10 3704.21,2672.25 3720,2688.04 v1(3720,2695)
  Top Layer w10: U6_LORA2.17 4048.88,3476.01 4048.88,3518.88 v1(4055,3525) ; U6_LORA1.17 4096.81,4353.03 4096.81,4391.81 v1(4105,4400)
  Bottom Layer w10: v1(3720,2695) 4055,3030 v1(4055,3525) 4105,3575 v1(4105,4400)
IO13: U1.12 U6_LORA1.18 U6_LORA2.18 | length 2035.2
  Top Layer w8: U1.12 3665,2643.58 v1(3665,2705)
  Top Layer w10: U6_LORA2.18 4020,3473.9 4022.07,3475.97 4021.38,3476.66 v1(4021.38,3526.54) ; U6_LORA1.18 4070,4351.81 v1(4070,4395)
  Bottom Layer w10: v1(3665,2705) 3685,2705 4021.38,3041.38 v1(4021.38,3526.54) ; v1@4022.07,3525.84 v1(4021.38,3526.54) ; v1(4070,4395) 4070,3577.92 4020,3527.92 v1(4021.38,3526.54)
IO14: U1.9 U6_LORA1.16 U6_LORA2.16 | length 2018.3
  Top Layer w8: U1.9 3723.9,2658.9 v1(3760,2695)
  Top Layer w10: U6_LORA2.16 4076.46,3477.99 4076.46,3494.28 4090,3507.83 v1(4090,3515) ; U6_LORA1.16 4118.27,4368.27 v1(4140,4390)
  Bottom Layer w10: v1(3760,2695) 4090,3025 v1(4090,3515) 4140,3565 v1(4140,4390)
IO15: U1.13 U6_LORA1.19 | length 1989.8
  Top Layer w8: v1(3635,2740) 3639.19,2735.81 3639.19,2684.31 3645.16,2678.34 U1.13
  Top Layer w10: v1(4035,4395) 4036.82,4393.18 4036.82,4353.58 U6_LORA1.19
  Bottom Layer w10: v1(3635,2740) 3628.19,2746.81 3628.19,2828.19 3965,3165 3965,3507.08 3958.19,3513.89 3958.19,3536.11 4045,3622.92 4045,4382.08 4035,4392.08 v1(4035,4395)
NetC3_2: C3.2 L1.1 U1.2 | length 103.1
  Top Layer w8: U1.2 3774.21,2495.79 3790,2480 L1.1
  Top Layer w10: L1.1 C3.2
NetC6_1: C6.1 U1.27 X1.1 | length 288
  Top Layer w8: C6.1 3625.47,2420.47 U1.27
  Top Layer w10: X1.1 3543.27,2253.5 3509.13,2287.64 3509.13,2345.35 3517.92,2354.13 3559.13,2354.13 C6.1
NetC7_1: C7.1 U1.28 X1.3 | length 240
  Top Layer w8: X1.3@3645.16,2316.5 U1.28
  Top Layer w10: X1.3 3645.16,2316.5 3653.5,2316.5 3695,2275 3695,2273.79 3718.79,2250 C7.1
NetC8_LORA1_2: C8_LORA1.2 U6_LORA1.6 X2_LORA1.1 | length 371.9
  Top Layer w10: U6_LORA1.6 4122.96,4109.96 4122.96,4093.6 4131.67,4084.88 4285.52,4084.88 4304.29,4066.11 4304.29,4003.38 C8_LORA1.2@4281.5,3980.59 ; X2_LORA1.1 4260.71,3980.59 C8_LORA1.2
NetC8_LORA2_2: C8_LORA2.2 U6_LORA2.6 X2_LORA2.1 | length 373.1
  Top Layer w10: U6_LORA2.6 4076.46,3234.37 4076.46,3218.01 4085.17,3209.29 4240.2,3209.29 4258.38,3191.11 4258.38,3128.38 C8_LORA2.2@4235,3105 ; X2_LORA2.1 4214.21,3105 C8_LORA2.2
NetC9_LORA1_2: C9_LORA1.2 U6_LORA1.5 X2_LORA1.3 | length 126.2
  Top Layer w10: U6_LORA1.5 4092.68,4095.59 4121.5,4066.77 C9_LORA1.2 4137.5,4039.59 4165.59,4039.59 X2_LORA1.3
NetC9_LORA2_2: C9_LORA2.2 U6_LORA2.5 X2_LORA2.3 | length 126.2
  Top Layer w10: U6_LORA2.5 4046.18,3220 4075,3191.18 C9_LORA2.2 4091,3164 4119.09,3164 X2_LORA2.3
NetC10_LORA1_1: C10_LORA1.1 U6_LORA1.4 | length 67.1
  Top Layer w10: U6_LORA1.4 4067.09,4075 C10_LORA1.1
NetC10_LORA2_1: C10_LORA2.1 U6_LORA2.4 | length 67.1
  Top Layer w10: U6_LORA2.4 4020.59,3199.41 C10_LORA2.1
NetC13_LORA1_1: C13_LORA1.1 U6_LORA1.2 | length 63
  Top Layer w10: C13_LORA1.1 4006.5,4071.18 4015.91,4080.59 U6_LORA1.2
NetC13_LORA2_1: C13_LORA2.1 U6_LORA2.2 | length 68
  Top Layer w10: C13_LORA2.1 3960,3195.59 3969.41,3205 U6_LORA2.2
NetC14_LORA1_1: C14_LORA1.1 Q1_LORA1.3 R8_LORA1.1 U5_LORA1.6 | length 261.8
  Top Layer w10: v1(3686.5,4030.59) 3725.5,4030.59 3749.91,4055 U5_LORA1.6 U5_LORA1.6@3794.5,4055 ; C14_LORA1.1 v1(3731.5,3975.59) R8_LORA1.1
  Bottom Layer w10: v1(3686.5,4030.59) 3686.5,4020.59 v1(3731.5,3975.59)
NetC14_LORA2_1: C14_LORA2.1 Q1_LORA2.3 R8_LORA2.1 U5_LORA2.6 | length 261.8
  Top Layer w10: v1(3640,3155) 3679,3155 3703.41,3179.41 U5_LORA2.6 U5_LORA2.6@3748,3179.41 ; C14_LORA2.1 v1(3685,3100) R8_LORA2.1
  Bottom Layer w10: v1(3640,3155) 3640,3145 v1(3685,3100)
NetC15_LORA1_1: C15_LORA1.1 U5_LORA1.3 | length 42.9
  Top Layer w10: C15_LORA1.1 3846.5,4106.18 U5_LORA1.3
NetC15_LORA1_2: C15_LORA1.2 C16_LORA1.2 L2_LORA1.1 | length 110.7
  Top Layer w10: C15_LORA1.2 3921.5,4105.59 L2_LORA1.1 3921.5,4065.59 C16_LORA1.2
NetC15_LORA2_1: C15_LORA2.1 U5_LORA2.3 | length 42.9
  Top Layer w10: C15_LORA2.1 3800,3230.59 U5_LORA2.3
NetC15_LORA2_2: C15_LORA2.2 C16_LORA2.2 L2_LORA2.1 | length 110.7
  Top Layer w10: C15_LORA2.2 3875,3230 L2_LORA2.1 3875,3190 C16_LORA2.2
NetC17_LORA1_2: C17_LORA1.2 L3_LORA1.2 U5_LORA1.5 | length 214.8
  Top Layer w10: L3_LORA1.2 C17_LORA1.2 3665.04,4050.59 3696.04,4081.59 3761.5,4081.59 3762.5,4080.59 U5_LORA1.5
NetC17_LORA2_2: C17_LORA2.2 L3_LORA2.2 U5_LORA2.5 | length 214.8
  Top Layer w10: L3_LORA2.2 C17_LORA2.2 3618.54,3175 3649.54,3206 3715,3206 3716,3205 U5_LORA2.5
NetC19_LORA1_2: C19_LORA1.2 R7_LORA1.2 U5_LORA1.4 | length 190
  Top Layer w10: C19_LORA1.2 3681.5,4166.59 3686.5,4161.59 R7_LORA1.2 ; U5_LORA1.4 3701.91,4106.18 3691.5,4116.59 ; R7_LORA1.2 3691.5,4140.59 3691.5,4116.59 ; R7_LORA1.2 3686.5,4121.59 3691.5,4116.59
NetC19_LORA2_2: C19_LORA2.2 R7_LORA2.2 U5_LORA2.4 | length 190
  Top Layer w10: C19_LORA2.2 3635,3291 3640,3286 R7_LORA2.2 ; U5_LORA2.4 3655.41,3230.59 3645,3241 ; R7_LORA2.2 3645,3265 3645,3241 ; R7_LORA2.2 3640,3246 3645,3241
NetC20_LORA1_1: C20_LORA1.1 C21_LORA1.2 C23_LORA1.2 L5_LORA1.2 | length 118.3
  Top Layer w10: C23_LORA1.2 3711.5,4230.59 3731.5,4230.59 C21_LORA1.2 3746.5,4201.59 3751.5,4196.59 L5_LORA1.2 C20_LORA1.1
NetC20_LORA1_2: C20_LORA1.2 C24_LORA1.2 L5_LORA1.1 U5_LORA1.1 | length 213.3
  Top Layer w10: C24_LORA1.2 L5_LORA1.1 C20_LORA1.2 3799,4140.59 3816.5,4123.09 3816.5,4056 3817.5,4055 U5_LORA1.1
NetC20_LORA2_1: C20_LORA2.1 C21_LORA2.2 C23_LORA2.2 L5_LORA2.2 | length 118.3
  Top Layer w10: C23_LORA2.2 3665,3355 3685,3355 C21_LORA2.2 3700,3326 3705,3321 L5_LORA2.2 C20_LORA2.1
NetC20_LORA2_2: C20_LORA2.2 C24_LORA2.2 L5_LORA2.1 U5_LORA2.1 | length 213.3
  Top Layer w10: C24_LORA2.2 L5_LORA2.1 C20_LORA2.2 3752.5,3265 3770,3247.5 3770,3180.41 3771,3179.41 U5_LORA2.1
NetC21_LORA1_1: C21_LORA1.1 C22_LORA1.2 L6_LORA1.1 L7_LORA1.1 | length 140
  Top Layer w10: C22_LORA1.2 C21_LORA1.1 3762.5,4255.59 3767.5,4250.59 L7_LORA1.1 3795.5,4250.59 3796.5,4249.59 3796.5,4226.59 3807.5,4215.59 L6_LORA1.1
NetC21_LORA2_1: C21_LORA2.1 C22_LORA2.2 L6_LORA2.1 L7_LORA2.1 | length 140
  Top Layer w10: C22_LORA2.2 C21_LORA2.1 3716,3380 3721,3375 L7_LORA2.1 3749,3375 3750,3374 3750,3351 3761,3340 L6_LORA2.1
NetC25_LORA1_2: C25_LORA1.2 C26_LORA1.2 L7_LORA1.2 U6_LORA1.25 | length 136.3
  Top Layer w10: L7_LORA1.2 C26_LORA1.2 C25_LORA1.2 3901.68,4250.59 3920.5,4231.77 U6_LORA1.25
NetC25_LORA2_2: C25_LORA2.2 C26_LORA2.2 L7_LORA2.2 U6_LORA2.25 | length 136.3
  Top Layer w10: L7_LORA2.2 C26_LORA2.2 C25_LORA2.2 3855.18,3375 3874,3356.18 U6_LORA2.25
NetC31_1: C31.1 U7.6 | length 50.1
  Top Layer w10: C31.1 5318,2354.76 5318,2339 5317.95,2338.95 U7.6
NetC31_2: C31.2 L8.2 U7.2 | length 517.4
  Top Layer w10: v1(5140,2315) L8.2 5203.19,2362.76 5203.19,2366.11 5218.89,2381.81 5250.94,2381.81 C31.2 ; v1(5330,2170) 5355.35,2195.35 U7.2
  Bottom Layer w10: v1(5140,2315) 5185,2315 v1(5330,2170)
NetL2_LORA1_2: L2_LORA1.2 L4_LORA1.1 U6_LORA1.1 | length 96.4
  Top Layer w10: L4_LORA1.1 3971.5,4063.59 3961.5,4073.59 L2_LORA1.2 3989.32,4085.59 3990.32,4086.59 U6_LORA1.1
NetL2_LORA2_2: L2_LORA2.2 L4_LORA2.1 U6_LORA2.1 | length 96.4
  Top Layer w10: L4_LORA2.1 3925,3188 3915,3198 L2_LORA2.2 3942.82,3210 3943.82,3211 U6_LORA2.1
NetL6_LORA1_2: L6_LORA1.2 U6_LORA1.27 | length 130.7
  Top Layer w10: L6_LORA1.2 3821.5,4175.9 3945.28,4175.9 U6_LORA1.27
NetL6_LORA2_2: L6_LORA2.2 U6_LORA2.27 | length 130.7
  Top Layer w10: L6_LORA2.2 3775,3300.31 3898.78,3300.31 U6_LORA2.27
NetLED1_1: LED1.1 R12.2 | length 169
  Top Layer w10: LED1.1 5990,3165 R12.2
NetQ1_LORA1_1: Q1_LORA1.1 R9_LORA1.2 | length 86.5
  Top Layer w10: R9_LORA1.2 3611.5,4100.49 3624,4087.99 Q1_LORA1.1
NetQ1_LORA2_1: Q1_LORA2.1 R9_LORA2.2 | length 86.5
  Top Layer w10: R9_LORA2.2 3565,3224.9 3577.5,3212.4 Q1_LORA2.1
NetR6_1: R6.1 U1.31 | length 81.9
  Top Layer w8: U1.31 3704.98,2445.81 R6.1
NetR10_1: R10.1 S1.1 | length 3079.7
  Top Layer w10: R10.1 3935,2290 v1(4000,2225)
  Bottom Layer w10: v1(4000,2225) 4465,2690 5575,2690 6050,3165 S1.1
NetR11_1: R11.1 S2.1 | length 3502.9
  Top Layer w10: R11.1 3541.72,2760 3636.72,2855 5315,2855 5820,3360 5820,3995 5945,4120 5983.39,4120 S2.1
NetR13_1: R13.1 U7.5 | length 51.1
  Top Layer w10: R13.1 5352.76,2341.6 5355.35,2339 U7.5
NetR14_2: R14.2 R15.1 R16.1
NetR15_2: R15.2 U7.4 | length 258
  Top Layer w10: U7.4 5402.76,2315 v1(5430,2315)
  Bottom Layer w10: v1(5230,2355) 5270,2315 v1(5430,2315)
nRESET: C1.1 R1.1 R10.2 U1.32 U3.3 U6_LORA1.7 U6_LORA2.7 | length 3193.4
  Top Layer w8: U1.32 3735.43,2435.05 3735.43,2369.57 R1.1
  Top Layer w10: U3.3 3257.4,2272.4 v1(3260,2275) ; R1.1 3740,2345 C1.1 R10.2 v1(3820,2330) ; U6_LORA2.7 4179.05,3239.05 v1(4190,3250) 4320,3250 v1(4340,3230) ; U6_LORA1.7 4225.55,4114.64 v1(4236.5,4125.59)
  Bottom Layer w10: v1@3257.4,2272.4 v1(3260,2275) 3737.08,2275 3778.89,2316.81 3806.81,2316.81 v1(3820,2330) 3865,2375 3865,2670 4340,3145 v1(4340,3230) ; v1(4190,3250) 4236.5,3296.5 v1(4236.5,4125.59)
RTS: P1.2 U3.2 U4.1 | length 328.1
  Top Layer w10: P1.2 3220.2,2309.8 U3.2 U4.1
RX: P1.4 U1.25 | length 711.6
  Top Layer w8: P1.4@3090,2650 3080,2640 3080,2635 3160,2555 3160,2480 3194.19,2445.81 3194.19,2438.32 3209.31,2423.2 3216.8,2423.2 3257,2383 3400.5,2383 3409.31,2374.19 3471.41,2374.19 3488.35,2391.13 3516.13,2391.13 3571.57,2446.57 U1.25
RXTX/RFMODE_LORA1: R7_LORA1.1 R9_LORA1.1 U6_LORA1.20 | length 579.8
  Top Layer w10: R9_LORA1.1 v1(3641.5,4185.59) 3646.5,4180.59 R7_LORA1.1 ; v1(3926.5,4365.59) 3965.13,4365.59 3978.2,4378.66 4011.22,4378.66 4011.22,4353.58 U6_LORA1.20
  Bottom Layer w10: v1(3641.5,4185.59) 3791.5,4185.59 3926.5,4320.59 v1(3926.5,4365.59)
RXTX/RFMODE_LORA2: R7_LORA2.1 R9_LORA2.1 U6_LORA2.20 | length 582.3
  Top Layer w10: R9_LORA2.1 v1(3595,3310) 3600,3305 R7_LORA2.1 ; v1(3880,3490) 3918.63,3490 3931.7,3503.07 3969.01,3503.07 3969.41,3502.67 U6_LORA2.20
  Bottom Layer w10: v1(3595,3310) 3745,3310 3880,3445 v1(3880,3490)
TX: P1.3 U1.26 | length 677.3
  Top Layer w8: P1.3@3065,2550 3065,2540 3250,2355 3491.92,2355 3510.05,2373.13 3538.13,2373.13 3581.83,2416.83 3596.37,2416.83 3605.02,2425.48 3605.02,2445.81 U1.26
VCC3V3: C11_LORA1.2 C11_LORA2.2 C12_LORA1.1 C12_LORA2.1 C27_LORA1.1 C27_LORA2.1 C28_LORA1.2 C28_LORA2.2 C29_LORA1.2 C29_LORA2.2 R8_LORA1.2 R8_LORA2.2 U6_LORA1.3 U6_LORA1.14 U6_LORA1.24 U6_LORA2.3 U6_LORA2.14 U6_LORA2.24 | length 4770
  Top Layer w10: R8_LORA2.2 4030,3100 C12_LORA2.1 ; U6_LORA2.24 3883.23,3381.77 3870,3395 3870,3396.25 3856.25,3410 C28_LORA2.2 C29_LORA2.2 3806.5,3413.5 3806.5,3425 3793.79,3425 3785,3433.79 3785,3466.21 3806.5,3487.71 ; U6_LORA1.24 3929.73,4257.36 3916.5,4270.59 3916.5,4271.84 3902.75,4285.59 C28_LORA1.2 C29_LORA1.2 3856.5,4300.59 3840.29,4300.59 3831.5,4309.38 3831.5,4356.5 3923.88,4448.88 4147.32,4448.88 4161.2,4435 4222.92,4435 4271.81,4386.11 4271.81,4363.89 4243.51,4335.59 C27_LORA1.1 ; U6_LORA2.3 3995,3143.79 4033.79,3105 C12_LORA2.1 ; U6_LORA1.3 4041.5,4019.38 4080.29,3980.59 C12_LORA1.1 ; U6_LORA2.14 4137.95,3432.95 C27_LORA2.1 ; U6_LORA1.14 4184.45,4308.54 C27_LORA1.1 ; 3806.5,3487.71 3863.79,3545 3967.08,3545 3975.44,3553.35 4299.56,3553.35 4310,3542.92 4310,3507.08 4281.11,3478.19 4184.4,3478.19 4166.21,3460 C27_LORA2.1 ; 3806.5,3487.71 R8_LORA1.2 4076.5,3975.59 C12_LORA1.1 ; C12_LORA2.1 C11_LORA2.2 4050,3070 4050,3053.79 4073.47,3030.31 4260.31,3030.31 4370,3140 4370,3255 C27_LORA2.1 ; C12_LORA1.1 C11_LORA1.2 4096.5,3945.59 4096.5,3929.38 4119.97,3905.9 4280.9,3905.9 4330,3955 4330,4142.08 4331.81,4143.89 4331.81,4215.28 C27_LORA1.1
VDD3V3: C2.1 C5.1 C32.1 L8.1 R1.2 R2.2 R3.2 R5.2 R12.1 R14.1 U1.1 U1.3 U1.4 U1.11 U1.17 U1.29 U1.30 U2.3 U2.7 U2.8 | length 5414
  Top Layer w8: R3.2 3529.19,2664.19 3529.19,2634.31 3544.31,2619.19 3544.71,2619.19 3550,2613.9 U1.17 ; U1.29 3664.84,2447 3684.53,2447 U1.30 ; U1.11 3684.53,2678.03 3690.81,2684.31 R5.2@3690.81,2764.19 ; U1.1 3753.43,2391.57 R1.2 ; U1.3 U1.3@3754,2515.47 ; U1.4 3754,2535.16 U1.3@3754,2515.47 ; R2.2 3814.53,2515.47 U1.3@3754,2515.47
  Top Layer w10: U2.8 U2.7 3320,2515 3270,2565 U2.3 3260,2683.43 C5.1 3275,2725 3306.1,2725 3308.89,2727.8 3381.11,2727.8 3423.9,2685 R3.2 3548.19,2686.81 3548.19,2738.19 3645,2835 3705,2835 3705,2831.21 3715,2821.21 3715,2788.79 3691.21,2765 R5.2 3690.81,2764.19 3733.19,2721.81 3771.11,2721.81 3925,2567.92 3925,2372.08 ; R1.2 C2.1 3830,2380 3857.08,2380 3883.89,2353.19 3906.11,2353.19 3925,2372.08 ; C32.1 5210.24,2187 L8.1 ; R14.1 5202.24,2257.24 L8.1 ; R12.1 6060,2485 5980.32,2405.32 5070.79,2405.32 5045,2379.52 5045,2288.19 5109.06,2288.19 L8.1 ; 3925,2372.08 4039.84,2257.24 L8.1
VDD5V: C30.1 J3.1 R13.2 U7.3 | length 502.6
  Top Layer w10: R13.2 5392.76,2348.54 5434.37,2348.54 5456.81,2326.11 5456.81,2303.89 5414.37,2261.46 5392.76,2261.46 U7.3 5381.18,2208.78 5381.18,2185.6 5369.76,2174.17 C30.1 5412.51,2072.24 J3.1
pads on no net: J3.3 U1.5 U6_LORA1.21 U6_LORA1.22 U6_LORA1.28 U6_LORA2.21 U6_LORA2.22 U6_LORA2.28

## Keep-outs
Keep-Out Layer:
  the board outline again, w10

## Other copper
Top Layer:

## Text inside footprints (layer, text, board x,y; h text height)
LED1: Top Overlay "+" at 6080,3265 h60 r180